# Altium PCB lcd board.PcbDoc
Units mm, origin at the board's own origin, x right, y up, seen from the top; angles counter-clockwise.
Board outline 172.25 x 58 mm, 2 copper layers (Top Layer, Bottom Layer); 15 components, 15 nets, 162 pads, 5 vias.
Unrouted connection lines stored in the file: 14.
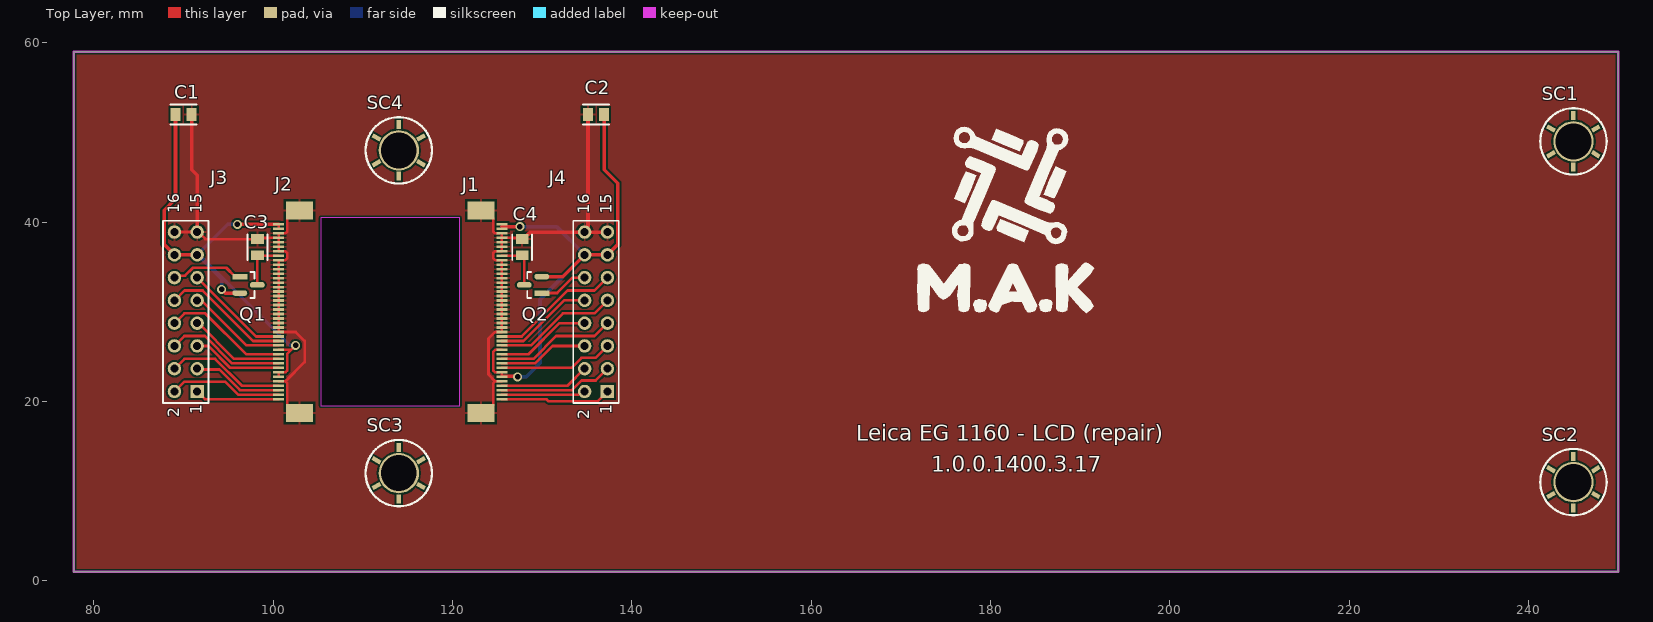
[diagram p0: Top Layer view]
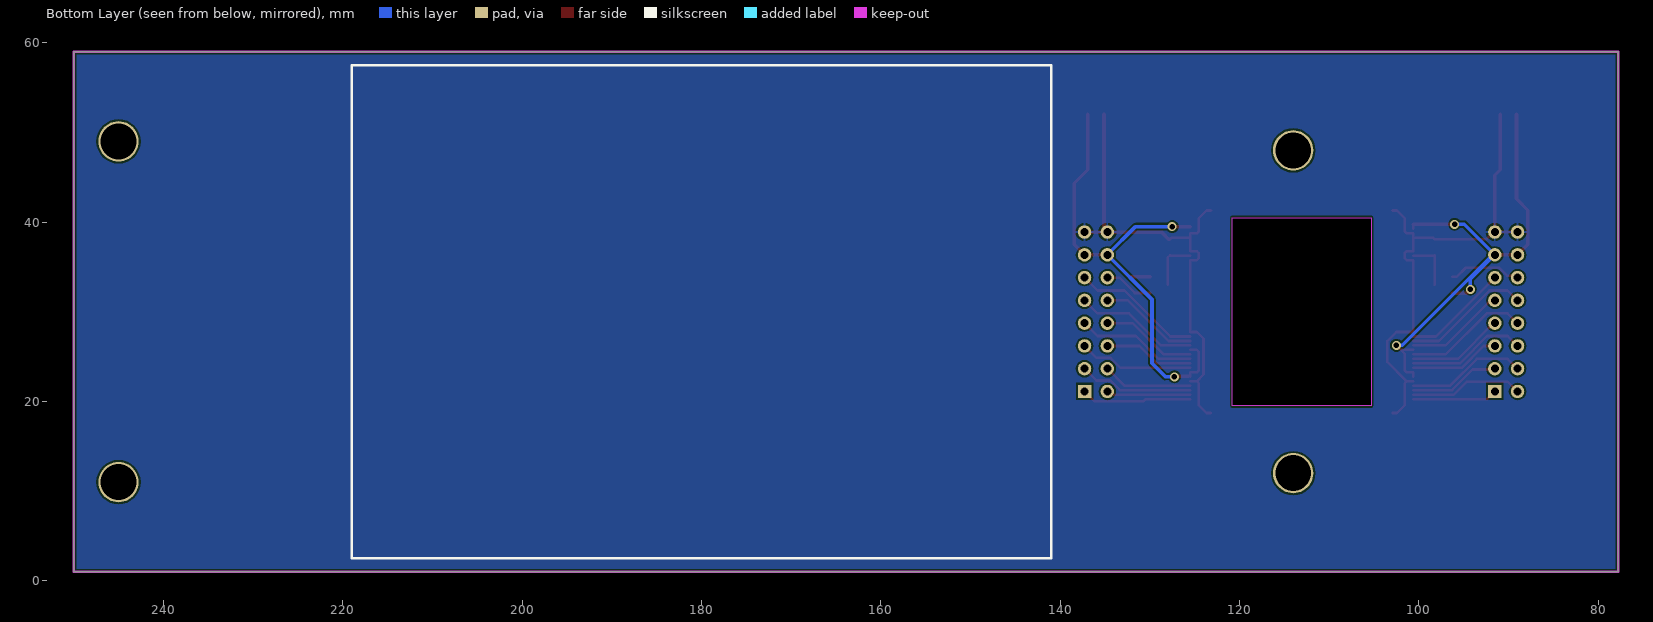
[diagram p1: Bottom Layer view, seen from below]
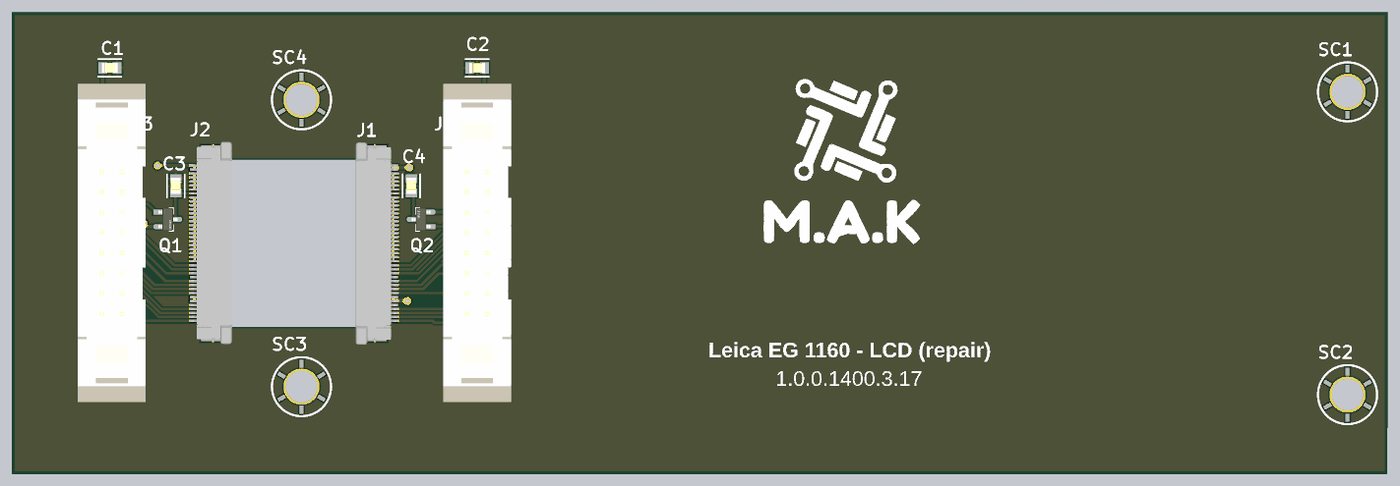
[diagram p2: 3D render of the assembled board from above, using the file's embedded part models]

## Layer stack, top to bottom
Top Solder: solder mask 0.0102, Solder Resist, Dk 3.5
Top Layer: signal copper 0.0356
Dielectric 1: dielectric 0.32, FR-4, Dk 4.8
Bottom Layer: signal copper 0.0356
Bottom Solder: solder mask 0.0102, Solder Resist, Dk 3.5

## Board outline
77.75,1 250,1 250,59 77.75,59
cut-out: 105.3,19.5 120.8,19.5 120.8,40.5 105.3,40.5

## Design rules (kind name [scope] priority, off if disabled: settings)
Clearance [All] p1: gap=0.2 ignorepadtopadclearanceinfootprint=FALSE except(0: Arc-Hole Track-Hole SMDPad-Hole THPad-Hole Via-Hole Fill-Hole Poly-Hole Region-Hole Text-Hole)
Height [All] p1: minheight=0 maxheight=30 prefheight=12.7
HoleSize [All] p1: absolutevalues=TRUE maxlimit=4 minlimit=0.025 maxpercent=80.000 minpercent=20.000
MinimumSolderMaskSliver [All] p1: minsoldermaskwidth=0.01
PolygonConnect [All] p1: connectstyle=Relief reliefconductorwidth=0.254 reliefentries=4 polygonreliefangle="90 Angle" airgapwidth=0.254
RoutingVias [All] p1: holewidth=0.6 width=1 viastyle="Through Hole" minholewidth=0.6 minwidth=0.5 maxholewidth=1 maxwidth=1.5
SilkToSolderMaskClearance [IsPad] p1: minsilkscreentomaskgap=0.1 clearancetoexposedcopper=TRUE
SolderMaskExpansion [All] p1: expansion=0.102 istentingtop=FALSE
Width [All] p1: maxlimit=0.4 minlimit=0.254 preferedwidth=0.3 minimp=50.000000 maximp=50.000000 favimp=50.000000
26 further rules are at their usual default settings.

## Components (designator, comment, footprint, x,y, rotation, side; value= is the part's Value field where it differs from the comment)
1.0.0.1400.3.17 "MAK logo" "MAk LOGO" 182.5,32.5 r0 top
C1 "2.2uf" cap_0805_B 90,52 r180 top locked
C2 "2.2uf" cap_0805_B 136,52 r0 top locked
C3 "2.2uf" cap_0805_B 98.25,37.2 r90 top locked
C4 "2.2uf" cap_0805_B 127.75,37.2 r90 top locked
J1 "Farnell no: 1112564" "FPC 40 - top" 125.5,30 r270 top locked value=LCD_ILI9341
J2 "Farnell no: 1112564" "FPC 40 - bottom" 100.6,30 r90 top locked value=LCD_ILI9341
J3 "Connector 16 pin" "DS1013-16S - with Latch/Eject Levers" 90.25,30 r90 top locked
J4 "Connector 16 pin" "DS1013-16S - with Latch/Eject Levers" 136,30 r90 top locked
Q1 "FDN336P" Diodes_Inc_SOT23_IPC_A 97.25,33 r0 top
Q2 "FDN336P" Diodes_Inc_SOT23_IPC_A 128.977,33 r180 top
SC1 "M4" SCREW_M4 245,49 r0 top locked
SC2 "M4" SCREW_M4 245,11 r0 top locked
SC3 "M4" SCREW_M4 114,12 r0 top locked
SC4 "M4" SCREW_M4 114,48 r0 top locked

## Footprints (in the part's own frame and the unit in brackets; to place one, negate y for a bottom-side part, rotate by r counter-clockwise, add the part's x,y. Pads: shape width x height; smd on the part's side, far side on the other; paste and mask are expansions set on the pad)
cap_0805_B [mil] "Samsung package"
  rect 43.5x55.44 smd paste+0 mask+0: 1(-35.46,0) 2(35.46,0)
  silkscreen extent -57,-43 57,43, body extent -39,-25 40,24, height 21
Diodes_Inc_SOT23_IPC_A [mm]
  rect 1.659x0.627 smd paste+0 mask+0: 1(-0.977,0.915)
  rrect100% 1.659x0.627 smd paste+0 mask+0: 2(-0.977,-0.915) 3(0.977,0)
  silkscreen extent 0.23,-1.45 0.65,1.45, body extent -2.31,-1.95 2.31,1.95, height 0.25
"DS1013-16S - with Latch/Eject Levers" [mm]
  rect 1.5x1.5 hole 0.9: 1(-8.89,-1.27)
  round 1.5 hole 0.9: 2(-8.89,1.27) 3(-6.35,-1.27) 4(-6.35,1.27) 5(-3.81,-1.27) 6(-3.81,1.27) 7(-1.27,-1.27) 8(-1.27,1.27) 9(1.27,-1.27) 10(1.27,1.27) 11(3.81,-1.27) 12(3.81,1.27) 13(6.35,-1.27) 14(6.35,1.27) 15(8.89,-1.27) 16(8.89,1.27)
  silkscreen extent -10.16,-2.54 10.16,2.54, body extent -19.9,-4.25 20,4.25, height 25.84
"FPC 40 - bottom" [mm] "0.5 mm"
  rect 2x3 smd: 0(-11.29,-2.325) 0(11.29,-2.325)
  rect 0.3x1.2 smd: 1(-9.75,0) 2(-9.25,0) 3(-8.75,0) 4(-8.25,0) 5(-7.75,0) 6(-7.25,0) 7(-6.75,0) 8(-6.25,0) 9(-5.75,0) 10(-5.25,0) 11(-4.75,0) 12(-4.25,0) 13(-3.75,0) 14(-3.25,0) 15(-2.75,0) 16(-2.25,0) 17(-1.75,0) 18(-1.25,0) 19(-0.75,0) 20(-0.25,0) 21(0.25,0) 22(0.75,0) 23(1.25,0) 24(1.75,0) 25(2.25,0) 26(2.75,0) 27(3.25,0) 28(3.75,0) 29(4.25,0) 30(4.75,0) 31(5.25,0) 32(5.75,0) 33(6.25,0) 34(6.75,0) 35(7.25,0) 36(7.75,0) 37(8.25,0) 38(8.75,0) 39(9.25,0) 40(9.75,0)
  body extent -12.68,-4.7 12.75,0.41, height 2.1
"FPC 40 - top" [mm] "0.5 mm"
  rect 2x3 smd: 0(-11.29,-2.325) 0(11.29,-2.325)
  rect 0.3x1.2 smd: 1(9.75,0) 2(9.25,0) 3(8.75,0) 4(8.25,0) 5(7.75,0) 6(7.25,0) 7(6.75,0) 8(6.25,0) 9(5.75,0) 10(5.25,0) 11(4.75,0) 12(4.25,0) 13(3.75,0) 14(3.25,0) 15(2.75,0) 16(2.25,0) 17(1.75,0) 18(1.25,0) 19(0.75,0) 20(0.25,0) 21(-0.25,0) 22(-0.75,0) 23(-1.25,0) 24(-1.75,0) 25(-2.25,0) 26(-2.75,0) 27(-3.25,0) 28(-3.75,0) 29(-4.25,0) 30(-4.75,0) 31(-5.25,0) 32(-5.75,0) 33(-6.25,0) 34(-6.75,0) 35(-7.25,0) 36(-7.75,0) 37(-8.25,0) 38(-8.75,0) 39(-9.25,0) 40(-9.75,0)
  body extent -12.68,-4.7 12.75,0.41, height 2.1
"MAk LOGO" [mm]
  silkscreen extent -10.61,-2.64 9.02,18.13
SCREW_M4 [mm]
  round 4.5 hole 4 mask+0: 0(0,0)
  rect 0.5x1 smd: 0(0,2.881) 12(0,2.881) 15(0,-2.881)
  rect 0.5x1 smd rot 60: 13(-2.495,1.441) 16(2.495,-1.441)
  rect 0.5x1 smd rot 120: 14(-2.495,-1.441) 17(2.495,1.441)
  silkscreen extent -3.7,-3.7 3.7,3.7

## Part data
C1 C2: library part Capacitor, "octopart or digikey description!", Part Number=C0402X7R160-104KNE, Capacitance=2.2uf
C3 C4: library part Capacitor, "octopart or digikey description!", Part Number=CL21A106KOQNNNG, Voltage Rating=16v, Capacitance=2.2uf
J1 J2: library part LCD_ILI9341, "50pin FPC connector, 0.5mm pitch, Top/Bottom contacts", Manufacturer="Omron Components", MPN=XF2M-5015-1A, TemperatureRange="-30°C to +85°C", AN=A08-1731, PartGroup="Mechanical devices,Connectors,PCB - receptacle"
Q1 Q2: library part DMP3099L-13_1, Part Number=DMP3099L-13
SC1 SC2 SC3 SC4: library part Screw_M4, "Screw"
J3: System=Connector

## Via types
v1: diameter 1, hole 0.6, Top Layer to Bottom Layer, 5 vias

## Nets (pads, with @x,y where several pads share a name; then routed paths per layer and width w, separated by ;. In a path a pad name is that pad's centre, name@x,y a point inside that pad or via, vN(x,y) a via of type N, cw(c..) or ccw(c..) an arc to the next point about the centre after c; other vN are vias at no path point)
+3.3: C1.2 C2.2 J1.6 J1.7 J1.12 J1.39 J1.40 J2.6 J2.7 J2.12 J2.39 J2.40 J3.13 J3.14 J4.13 J4.14 Q1.2 Q2.2 | length 117.8
  Top Layer w0.3: J2.6 J2.7 101.345,23.25 101.55,23.455 101.55,25.3 102,25.75 ; J2.12 102,25.75 ; J2.39 J2.40 ; v1(102.5,26.25) 102,25.75 ; J1.6 J1.7 124.755,23.25 124.55,23.455 124.55,25.545 124.755,25.75 J1.12
  Top Layer w0.4: C1.2 89.099,42.589 87.83,41.32 87.83,37.5 J3.14 J3.13 ; v1(94.25,32.5) 94.665,32.085 Q1.2 ; v1(96,39.75) J2.40 ; 125.5,39.5 v1(127.5,39.5) ; J1.6@125.7,22.8 127.2,22.8 v1(127.25,22.75) ; Q2.2 132.295,33.915 J4.14 J4.13 138.42,37.5 138.42,44.329 136.901,45.848 C2.2
  Bottom Layer w0.4: v1(94.25,32.5) 94.25,33.62 J3.13 ; v1(96,39.75) 94.92,39.75 J3.13 ; v1(102.5,26.25) 101.838,26.25 91.738,36.35 J3.13 ; v1(127.25,22.75) 128.25,22.75 129.75,24.25 129.75,31.37 J4.14 131.58,39.5 v1(127.5,39.5)
BACKLIGHT: C3.1 C4.1 J1.33 J2.33 Q1.3 Q2.3 | length 11.4
  Top Layer w0.3: Q1.3 98.229,33.002 98.229,36.278 C3.1 98.299,36.25 J2.33 ; J1.33 127.701,36.25 C4.1 128,36.049 Q2.3
GND: C1.1 C2.1 C3.2 C4.2 J1.0 J1.5 J1.16 J1.17 J1.18 J1.19 J1.20 J1.21 J1.22 J1.23 J1.24 J1.25 J1.26 J1.27 J1.28 J1.29 J1.30 J1.31 J1.32 J1.34 J1.35 J1.36 J1.37 J1.38 J2.0 J2.5 J2.16 J2.17 J2.18 J2.19 J2.20 J2.21 J2.22 J2.23 J2.24 J2.25 J2.26 J2.27 J2.28 J2.29 J2.30 J2.31 J2.32 J2.34 J2.35 J2.36 J2.37 J2.38 J3.15 J3.16 J4.15 J4.16 | length 110.6
  Top Layer w0.3: J3.16 J3.15 91.638,38.89 92.428,38.101 C3.2 98.399,38.25 J2.37 ; J2.5 101.345,22.25 ; J2.0@102.925,18.71 102.425,18.71 101.575,19.56 101.575,22.02 101.345,22.25 ; J2.0@102.925,41.29 102.425,41.29 101.575,40.44 101.575,38.98 101.345,38.75 J2.38 J2.37 ; J1.0@123.175,18.71 123.675,18.71 124.525,19.56 124.525,22.02 124.755,22.25 ; J1.0@123.175,41.29 123.675,41.29 124.525,40.44 124.525,38.98 124.755,38.75 J1.38 J1.37 ; J1.5 124.755,22.25 ; C4.2 127.601,38.25 J1.37 ; J2.37 J2.36 J2.35 J2.34 101.345,36.75 101.55,36.545 101.55,35.955 101.345,35.75 J2.32 J2.31 J2.30 J2.29 J2.28 J2.27 J2.26 J2.25 J2.24 J2.23 J2.22 J2.21 J2.20 J2.19 J2.18 J2.17 J2.16 102.5,27.75 103.5,26.75 103.5,24.405 101.345,22.25 ; 124.755,22.25 124,23.005 124,26.995 124.755,27.75 J1.16 J1.17 J1.18 J1.19 J1.20 J1.21 J1.22 J1.23 J1.24 J1.25 J1.26 J1.27 J1.28 J1.29 J1.30 J1.31 J1.32 124.755,35.75 124.55,35.955 124.55,36.545 124.755,36.75 125.05,36.75 J1.34 J1.35 J1.36 J1.37
  Top Layer w0.4: C1.1 90.901,45.848 91.52,45.229 J3.15 ; C4.2 127.902,38.101 128.691,38.89 J4.16 ; C2.1 135.099,39.557 134.73,39.188 J4.16 ; J4.15 J4.16
LCD_BACKLIGHT: J3.12 J4.12 Q1.1 Q2.1 | length 13.7
  Top Layer w0.3: J3.12 89.196,34.026 90.18,34.026 91.064,34.91 94.762,34.91 95.757,33.915 Q1.1 ; Q2.1 131.657,32.085 133.382,33.81 J4.12
LCD_CS: J1.9 J2.9 J3.6 J4.6 | length 23.4
  Top Layer w0.3: J3.6 90.08,27.29 92.374,27.29 95.414,24.25 J2.9 ; J1.9 129.208,24.25 131.148,26.19 J4.6
LCD_DC: J1.11 J2.11 J3.8 J4.8 | length 24.6
  Top Layer w0.3: J3.8 90.08,29.83 92.42,29.83 97,25.25 J2.11 ; J1.11 128.438,25.25 131.918,28.73 J4.8
LCD_FMARK: J1.8 J2.8 J3.5 J4.5 | length 22.9
  Top Layer w0.3: J3.5 92.767,26.19 95.207,23.75 J2.8 ; J1.8 133.274,23.75 134.38,24.855 135.935,24.855 J4.5
LCD_RESET: J1.15 J2.15 J3.11 J4.11 | length 26.3
  Top Layer w0.3: J3.11 98.08,27.25 J2.15 ; J1.15 127.711,27.25 132.831,32.37 135.83,32.37 J4.11
MISO: J1.14 J2.14 J3.10 J4.10 | length 25.5
  Top Layer w0.3: J3.10 89.02,31.27 90.12,32.37 92.13,32.37 97.75,26.75 J2.14 ; J1.14 127.918,26.75 132.438,31.27 J4.10
MOSI: J1.13 J2.13 J3.9 J4.9 | length 25
  Top Layer w0.3: J3.9 91.75,31.04 92.21,31.04 97,26.25 J2.13 ; J1.13 128.731,26.25 132.311,29.83 135.83,29.83 J4.9
SCK: J1.10 J2.10 J3.7 J4.7 | length 24.1
  Top Layer w0.3: J3.7 91.641,28.73 95.621,24.75 99.609,24.75 J2.10 ; J1.10 129.001,24.75 131.541,27.29 135.83,27.29 J4.7
TOUCH_XL: J1.1 J2.1 J3.1 J4.1 | length 21.8
  Top Layer w0.3: J3.1 92.38,20.25 J2.1 ; J1.1 130.448,20.25 130.688,20.01 136.17,20.01 J4.1
TOUCH_XR: J1.3 J2.3 J3.3 J4.3 | length 22.8
  Top Layer w0.3: J3.3 91.617,23.553 93.99,23.553 96.293,21.25 J2.3 ; J1.3 133.314,21.25 134.4,22.335 135.955,22.335 J4.3
TOUCH_YD: J1.4 J2.4 J3.4 J4.4 | length 23.3
  Top Layer w0.3: J3.4 90.08,24.75 93.5,24.75 96.5,21.75 J2.4 ; J1.4 132.83,21.75 J4.4
TOUCH_YU: J1.2 J2.2 J3.2 J4.2 | length 22.1
  Top Layer w0.3: J3.2 90.08,22.21 94.626,22.21 96.086,20.75 J2.2 ; J1.2 134.045,20.75 134.405,21.11 J4.2
pads on no net: SC1.0 SC1.12 SC1.13 SC1.14 SC1.15 SC1.16 SC1.17 SC2.0 SC2.12 SC2.13 SC2.14 SC2.15 SC2.16 SC2.17 SC3.0 SC3.12 SC3.13 SC3.14 SC3.15 SC3.16 SC3.17 SC4.0 SC4.12 SC4.13 SC4.14 SC4.15 SC4.16 SC4.17

## Polygon pours and split planes (outlines as drawn)
GND on Top Layer "GND_L01_P000" (solid, remove dead copper, pour order 0): 77.75,59 77.75,1 250,1 250,59
GND on Bottom Layer "GND_L02_P001" (solid, pour order 1): 250,1 250,59 77.75,59 77.75,1

## Keep-outs
Keep-Out Layer:
  rectangle: 105.3,19.5 120.8,40.5
  lines w0.3: 77.75,1 77.75,59 250,59 250,1 77.75,1

## Silkscreen, mask and mechanical layers (free items; w line width, h text height)
Top Overlay:
  text "Leica EG 1160 - LCD (repair)" at 165,15 h3
Bottom Overlay:
  lines w0.3: 141,2.5 219,2.5 219,57.5 141,57.5 141,2.5
Mechanical 10:
  lines w0.3: 113.05,19.5 113.05,40.5 ; 126.4,19.5 99.7,19.5 99.7,40.5 126.4,40.5 ; 141.3,3 126.4,3 126.4,57 141.3,57
Mechanical 13:
  circle w1: c285.5,49 r1.5
  circle w1: c245,49 r1.5
  circle w1: c285.5,11 r1.5
  circle w1: c114,48 r1.5
  circle w1: c62,48 r1.5
  circle w1: c114,12 r1.5
  circle w1: c62,12 r1.5
  circle w1: c245,11 r1.5
  lines w1: 0,0 360,0 360,60 0,60 0,0

## Text inside footprints (layer, text, board x,y; h text height)
J3: Top Overlay "2" at 89.5,18.25 h1.27 r90; Top Overlay "1" at 92.028,18.57 h1.27 r90; Top Overlay "15" at 92,41 h1.27 r90; Top Overlay "16" at 89.5,41 h1.27 r90
J4: Top Overlay "2" at 135.25,18 h1.27 r90; Top Overlay "1" at 137.778,18.57 h1.27 r90; Top Overlay "15" at 137.778,40.914 h1.27 r90; Top Overlay "16" at 135.238,40.914 h1.27 r90